# Altium PCB WPTChargerCoil.PcbDoc
Units mm, origin at the board's own origin, x right, y up, seen from the top; angles counter-clockwise.
Board outline 79.94 x 57.15 mm, 2 copper layers (Top Layer, Bottom Layer), stack 1.554 mm thick; 15 components, 4 nets, 22 pads, 0 vias.
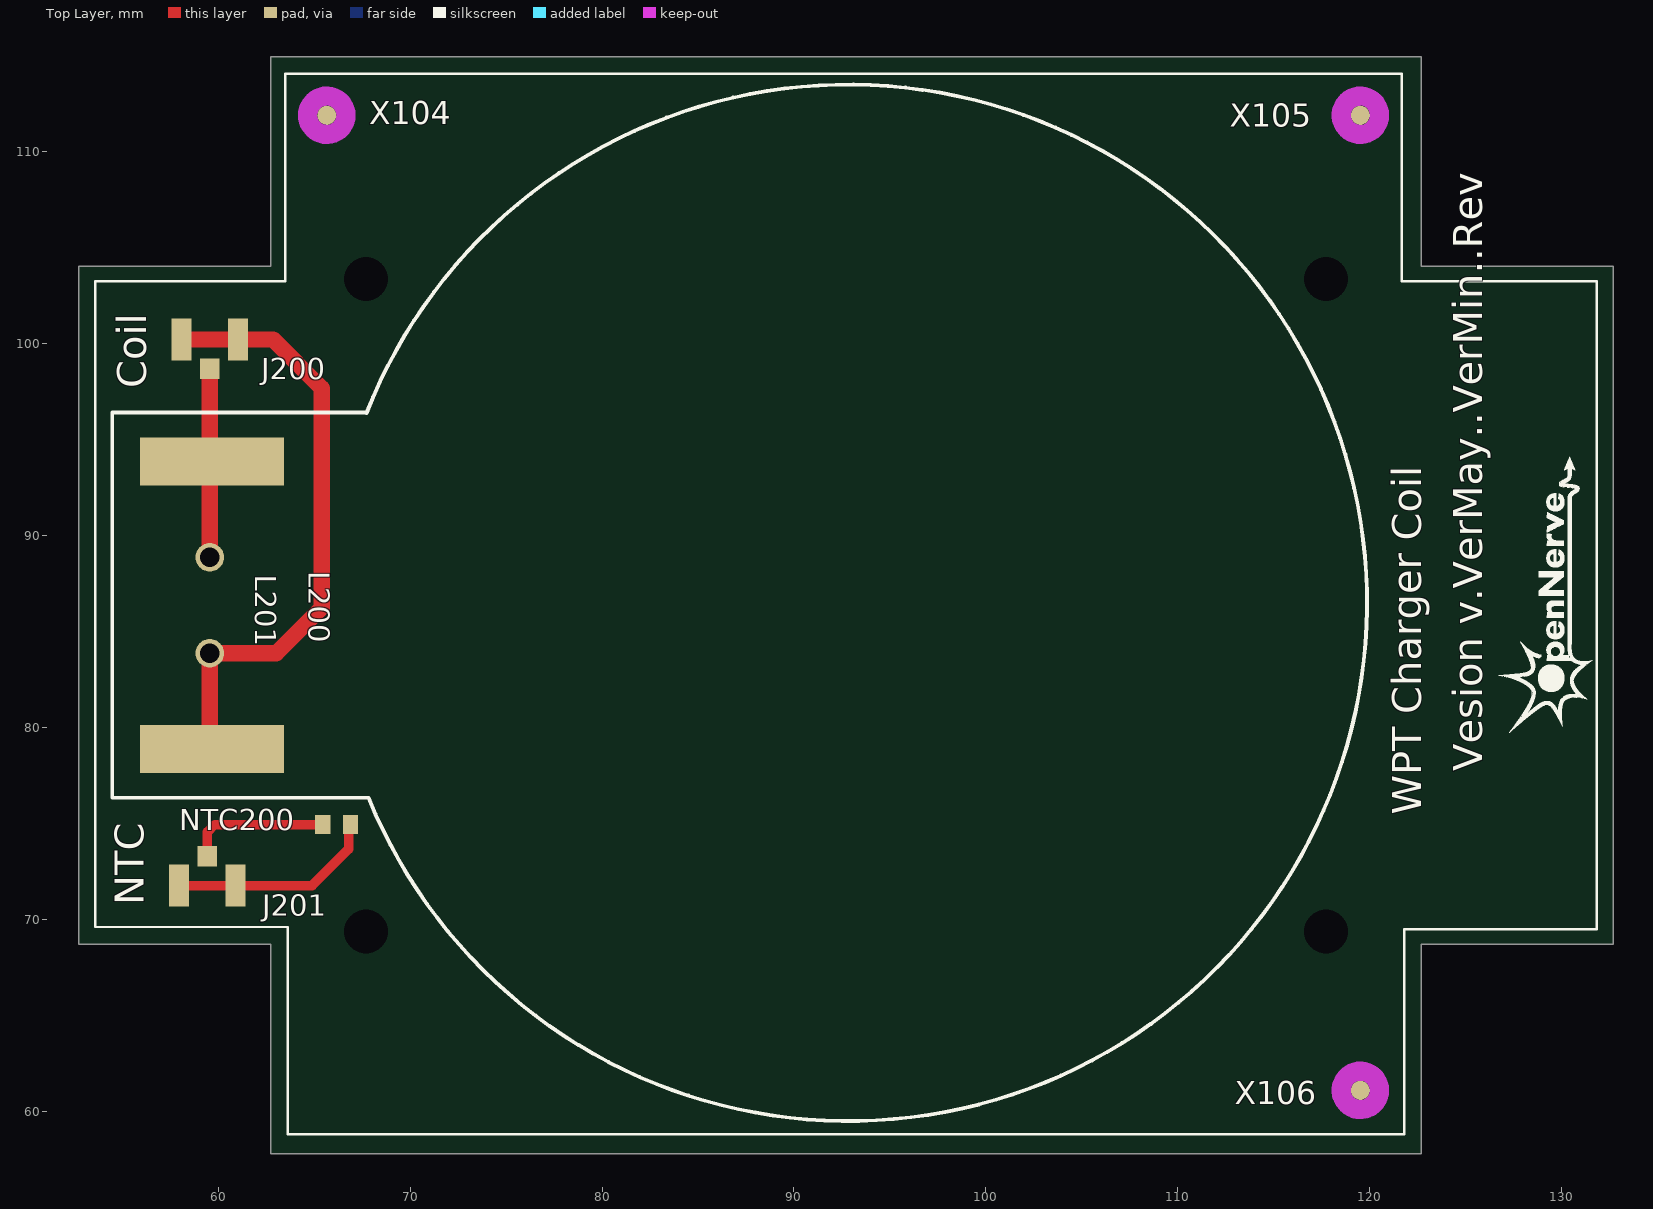
[diagram p0: Top Layer view]
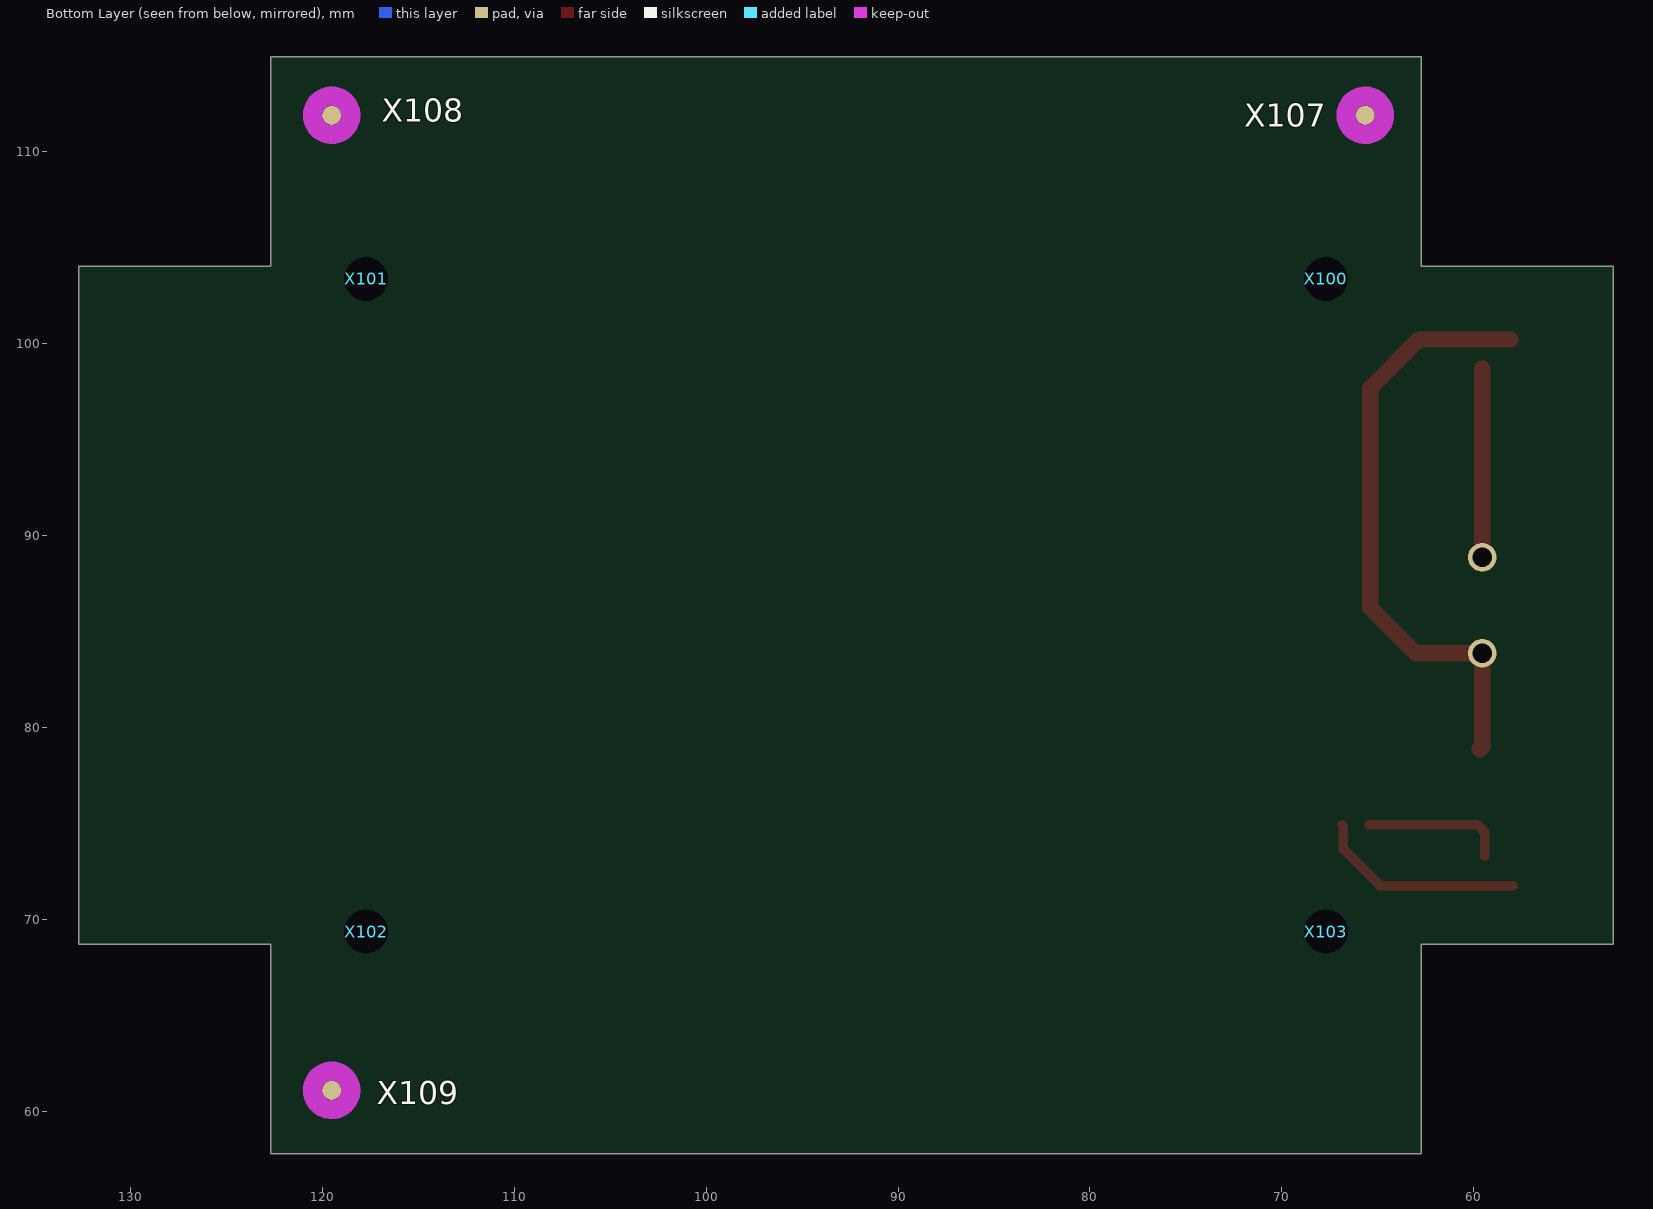
[diagram p1: Bottom Layer view, seen from below]
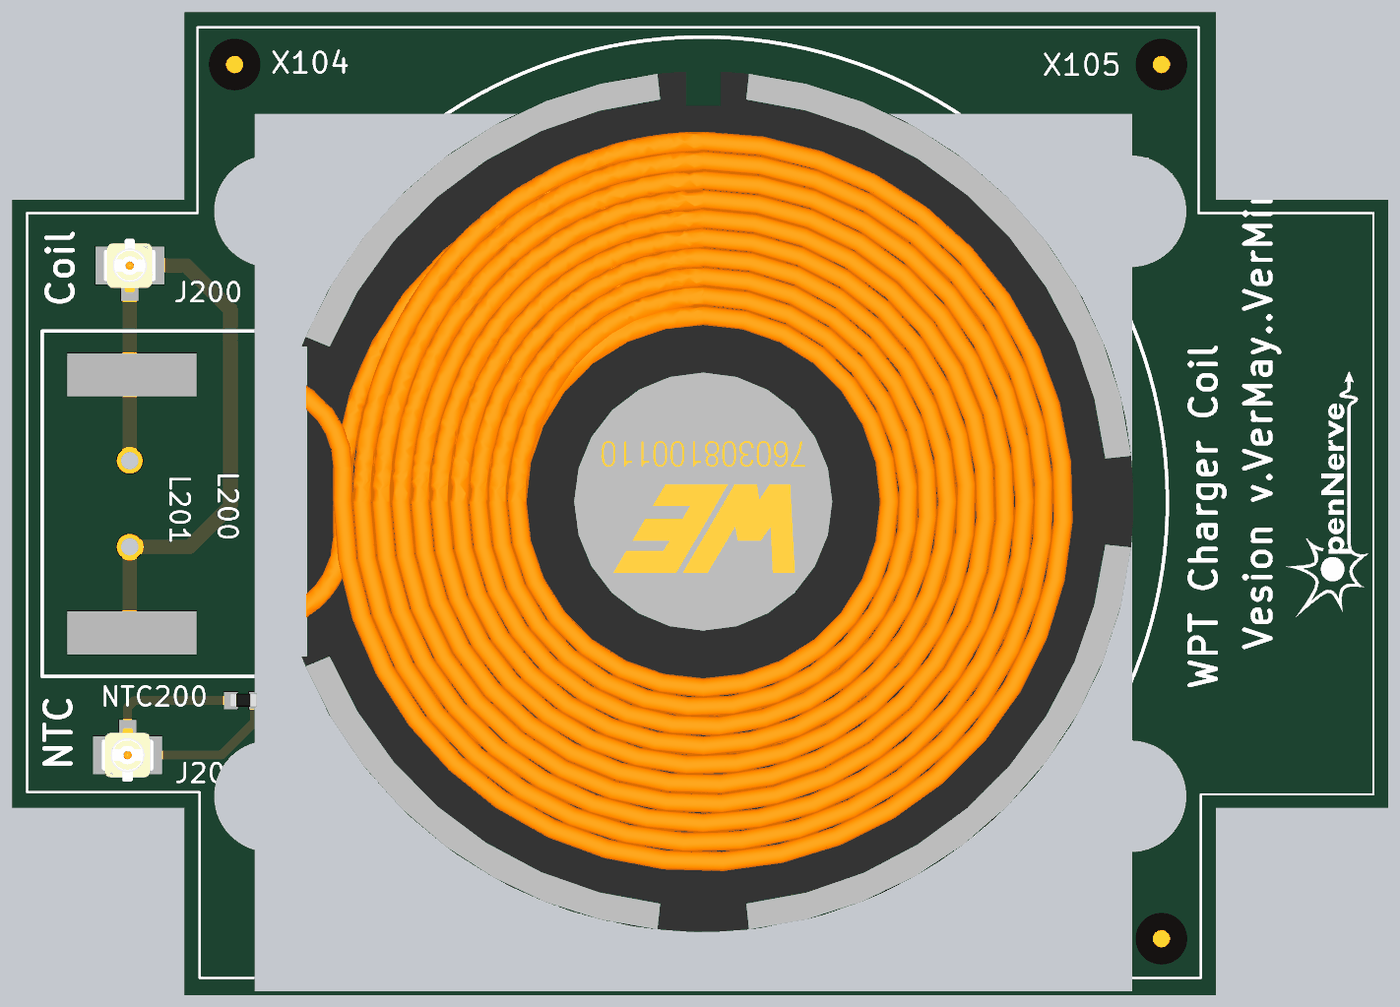
[diagram p2: 3D render of the assembled board from above, using the file's embedded part models]

## Layer stack, top to bottom
Top Solder: solder mask 0.0178, Solder Resist, Dk 3.5
Top Layer: signal copper 0.0356
Dielectric 1: dielectric 1.4834, FR-4, Dk 4.8
Bottom Layer: signal copper 0.0356
Bottom Solder: solder mask 0.0178, Solder Resist, Dk 3.5

## Board outline
52.738,68.707 52.738,104.013 62.738,104.013 62.738,114.935 122.682,114.935 122.682,104.013 132.682,104.013 132.682,68.707 122.682,68.707 122.682,57.789 62.738,57.789 62.738,68.707

## Design rules (kind name [scope] priority, off if disabled: settings)
BoardOutlineClearance [All] p1: gap=0.5 ignorepadtopadclearanceinfootprint=FALSE
Clearance [All] p1: gap=0.254 ignorepadtopadclearanceinfootprint=TRUE
ComponentClearance [All] p1: gap=0.127 collisioncheckmode=3 verticalgap=0.127 showdistances=TRUE
DiffPairsRouting [All] p1: maxlimit=0.254 minlimit=0.127 mostfreqgap=0.127 toplayer_minwidth=0.127 toplayer_maxwidth=25.4 toplayer_prefwidth=0.127 bottomlayer_minwidth=0.127 bottomlayer_maxwidth=25.4 bottomlayer_prefwidth=0.127 maxuncoupledlength=12.7
Height [All] p1: minheight=0 maxheight=1816.048 prefheight=12.7
HoleSize [All] p1: absolutevalues=TRUE maxlimit=6.3 minlimit=0.3 maxpercent=80.000 minpercent=20.000
HoleToHoleClearance [All] p1: gap=0.254 allowstackedmicrovias=FALSE
MinimumAnnularRing [All] p1: minimumring=0.152
MinimumSolderMaskSliver [All] p1: minsoldermaskwidth=0.152
PlaneClearance [All] p1: clearance=0.127
PlaneConnect PlaneConnectPowerPads [InPadClass('PowerPads')] p1: planeconnectstyle=Direct reliefexpansion=0.508 reliefentries=4 reliefconductorwidth=0.254 reliefairgap=0.254
PlaneConnect [All] p2: pad.planeconnectstyle=Relief pad.reliefexpansion=0.3 pad.reliefentries=4 pad.reliefconductorwidth=0.127 pad.reliefairgap=0.127 via.planeconnectstyle=Direct via.reliefexpansion=0.3 via.reliefentries=4 via.reliefconductorwidth=0.127 via.reliefairgap=0.127
PolygonConnect [All] p1: thpad.connectstyle=Relief thpad.reliefconductorwidth=0.127 thpad.reliefentries=4 thpad.polygonreliefangle="90 Angle" thpad.airgapwidth=0.127 smdpad.connectstyle=Relief smdpad.reliefconductorwidth=0.127 smdpad.reliefentries=4 smdpad.polygonreliefangle="90 Angle" smdpad.airgapwidth=0.127 via.connectstyle=Direct via.reliefconductorwidth=0.127 via.reliefentries=4 via.polygonreliefangle="90 Angle" via.airgapwidth=0.127
RoutingVias [All] p1: holewidth=0.3 width=0.6 viastyle="Through Hole" minholewidth=0.3 minwidth=0.6 maxholewidth=0.6 maxwidth=6.6
SilkToSilkClearance [All] p1: silktosilkclearance=0.127
SilkToSolderMaskClearance [IsPad] p1: minsilkscreentomaskgap=0.127 clearancetoexposedcopper=TRUE
SolderMaskExpansion [All] p1: expansion=0.051 istentingtop=FALSE
SupplyNets "Schematic Supply Nets" [InNet('GND')] p1: voltage=0.000
UnRoutedNet [All] p1: checkbadconnections=TRUE
Width Width_10mil [All] p1: maxlimit=25.4 minlimit=0.254 preferedwidth=0.254 minimp=50.000000 maximp=50.000000 favimp=50.000000
Width Width_6mil [All] p2: maxlimit=25.4 minlimit=0.152 preferedwidth=0.152 minimp=50.000000 maximp=50.000000 favimp=50.000000
Width Power_20mil [All] p3: maxlimit=25.4 minlimit=0.508 preferedwidth=0.508 minimp=50.000000 maximp=50.000000 favimp=50.000000
Width Power_12mil [All] p4: maxlimit=25.4 minlimit=0.305 preferedwidth=0.305 minimp=50.000000 maximp=50.000000 favimp=50.000000
Width Width_5mil [All] p5: maxlimit=25.4 minlimit=0.127 preferedwidth=0.127 minimp=50.000000 maximp=50.000000 favimp=50.000000
19 further rules are at their usual default settings.

## Classes and differential pairs
component class 02-TxCoil: J200 J201 L200 L201 NTC200
component class 01-Cover: X100 X101 X102 X103 X104 X105 X106 X107 X108 X109

## Components (designator, comment, footprint, x,y, rotation, side; value= is the part's Value field where it differs from the comment)
J200 "U.FL-R-SMT-1(10)" FP-U_FL-R-SMT-1_10-MFG 59.563,100.203 r0 top
J201 "U.FL-R-SMT-1(10)" FP-U_FL-R-SMT-1_10-MFG 59.436,71.755 r180 top
L200 "760308100110" "760308100110 SMD" 59.69,86.36 r0 top locked value=24uH
L201 "760308100110" Coil_pads-5mm-ThroughHole 59.563,86.36 r90 top value=24uH
NTC200 "NTCS0603E3502FLT" NTC0603 66.167,74.93 r180 top value=5k
X100 "HOLE_UNPLATED_2.3MM" HOLE_UNPLATED_2.3MM_COUNTERSINK 67.71,103.36 r90 bottom
X101 "HOLE_UNPLATED_2.3MM" HOLE_UNPLATED_2.3MM_COUNTERSINK 117.71,103.36 r90 bottom
X102 "HOLE_UNPLATED_2.3MM" HOLE_UNPLATED_2.3MM_COUNTERSINK 117.71,69.36 r90 bottom
X103 "HOLE_UNPLATED_2.3MM" HOLE_UNPLATED_2.3MM_COUNTERSINK 67.71,69.36 r90 bottom
X104 "FIDUCIAL" Fid_IPC-7351B 65.659,111.887 r90 top
X105 "FIDUCIAL" Fid_IPC-7351B 119.507,111.887 r90 top
X106 "FIDUCIAL" Fid_IPC-7351B 119.507,61.087 r90 top
X107 "FIDUCIAL" Fid_IPC-7351B 65.659,111.887 r90 bottom
X108 "FIDUCIAL" Fid_IPC-7351B 119.507,111.887 r90 bottom
X109 "FIDUCIAL" Fid_IPC-7351B 119.507,61.087 r90 bottom

## Footprints (in the part's own frame and the unit in brackets; to place one, negate y for a bottom-side part, rotate by r counter-clockwise, add the part's x,y. Pads: shape width x height; smd on the part's side, far side on the other; paste and mask are expansions set on the pad)
"760308100110 SMD" [mm]
  rect 7.5x2.5 smd: 1(0,-7.5) 2(0,7.5)
  silkscreen extent -5.21,-26.87 60.16,27.13, body extent 9.87,-24.86 58.18,25.11, height 4.26
Coil_pads-5mm-ThroughHole [mm]
  round 1.5 hole 1.02: 1(-2.5,0) 2(2.5,0)
Fid_IPC-7351B [mm]
  round 1 smd paste-5 mask+1: Fid(0,0)
  Top Layer keep-out circle w1: c0,0 r1
FP-U_FL-R-SMT-1_10-MFG [mm]
  rect 1x1.05 smd: 1(0,-1.525)
  rect 1.05x2.2 smd: 2(1.475,0) 3(-1.475,0)
  body extent -1.5,-1.55 1.5,1.55, height 1.45
HOLE_UNPLATED_2.3MM_COUNTERSINK [mm] "4.4mm diamater and 90 degrees angle countersink"
  round 0 hole 2.3 unplated paste-2539.97 mask+0.102: 1(0,0)
NTC0603 [mm] "Chip Resistor, 2-Leads, Body 1.50x0.80mm, IPC High Density"
  rect 0.8x1 smd: 1(-0.725,0) 2(0.725,0)
  body extent -0.8,-0.42 0.8,0.38, height 0.8

## Part data
J200 J201: "RF Connector, 1 Contact(s), Male, Board Mount, Surface Mount Terminal, Receptacle", Contact Resistance=20mR, Dielectric Withstanding Voltage (AC)=200V, Insulation Color=Beige, Insulation Resistance=500MR, Manufacturer=Hirose, Max Operating Temperature=90°C, Min Operating Temperature=-40°C, Operating Frequency-Max=6GHz, Supplier Part Number=H11891CT-ND, Body Depth=0.098inch, Body Diameter=0.079inch, Body/Shell Style=RECEPTACLE, Category="RF / Coaxial Connectors", Characteristic Impedance=50R, ComponentLink1Description=https://datasheet.ciiva.com:443/pdfs/VipMasterIC/IC/HIRO/HIROS10696/HIROS08829-1.pdf?src-supplier=IHS+Markit, ComponentLink1URL=https://datasheet.ciiva.com:443/pdfs/VipMasterIC/IC/HIRO/HIROS10696/HIROS08829-1.pdf?src-supplier=IHS+Markit, ComponentLink2Description=https://datasheet.ciiva.com/11762/0900766b8105243f-11762474.pdf?src-supplier=Rs, ComponentLink2URL=https://datasheet.ciiva.com/11762/0900766b8105243f-11762474.pdf?src-supplier=Rs, ComponentLink3Description=https://datasheet.ciiva.com/7651/91524-7651914.pdf?src-supplier=Element14, ComponentLink3URL=https://datasheet.ciiva.com/7651/91524-7651914.pdf?src-supplier=Element14, ComponentLink4Description=https://datasheet.ciiva.com/7651/91524-7651915.pdf?src-supplier=Element14, ComponentLink4URL=https://datasheet.ciiva.com/7651/91524-7651915.pdf?src-supplier=Element14, Connector Type="RF CONNECTOR", Contact Finish - Mating=GOLD, Contact Finish - Termination=GOLD, Contact Gender=Male, Contact Material=Bronze, Contact Style=Coax, Coupling Type=Snap, DIN Conformance=No, Durability=30Cycles, Filter Feature=No, IEC Conformance=No, Insertion Loss=0.05dB, Insulation Material=Polymer, JESD-609 Code=e4, Manufacturer Part Number=U.FL-R-SMT-1(10), Mating Information="MULTIPLE MATING PARTS AVAILABLE", MIL Conformance=No, Mounting Option 1=LOCKING, Mounting Style=STRAIGHT, Mounting Technology=Board, Number of Contacts=1, Number of Ports=1, Option="General Purpose", Panel Mount=No, Pricing="1=1,35, 10=1,138, 25=1,092, 50=1,0686, 100=1,0221, 250=0,9292, 500=0,83628, 1000=0,74336 (USD)", Reach SVHC Compliant=Yes, Reference Standard=UL, Reliability=COMMERCIAL, RoHS=Yes, RoHS Compliant=Yes, Shell Finish=Silver, Shell Material=CuSn, Stock=112692, Supplier=Digi-Key, Supplier 1=Digikey, Supplier Part Number 1=H11891CT-ND, System=Connector, Termination=SMD/SMT, VSWR=1.5
L200 L201: "1 Coil, 2 Layer 24µH Wireless Charging Coil Transmitter 70mOhm", Manufacturer=Wurth, Rating=6A, Supplier Part Number 1=732-5283-ND, Category=Coil, Diameter=50mm, Manufacturer Part Number=760308100110, Supplier 1=Digikey, Thickness=6mm
NTC200: "NTC SMD 0603, 5KOHM, 1%, B25/85", B Tolerance=1%, Manufacturer="Vishay Dale", Max Power=100mW, Operating Temperature="40°C ~ 125°C", Package=0603, Manufacturer Part Number=NTCS0603E3502FLT, Mounting Type="Surface Mount", Tolerance=1%
X100 X101 X102 X103: "Hole, Unplated, 2.3mm"
X104 X105 X106 X107 X108 X109: "FIDUCIAL_MARK", Manufacturer PN=FIDUCIAL

## Nets (pads, with @x,y where several pads share a name; then routed paths per layer and width w, separated by ;. In a path a pad name is that pad's centre, name@x,y a point inside that pad or via, vN(x,y) a via of type N, cw(c..) or ccw(c..) an arc to the next point about the centre after c; other vN are vias at no path point)
GND: J201.2 J201.3 NTC200.1 | length 10.9
  Top Layer w0.5: J201.2 J201.3 64.897,71.755 66.802,73.66 66.802,74.84 NTC200.1
NTC: J201.1 NTC200.2 | length 7.4
  Top Layer w0.5: J201.1 59.436,74.549 59.817,74.93 NTC200.2
Tx_COIL_1: J200.1 L200.2 L201.2 | length 9.9
  Top Layer w0.85: J200.1 59.563,93.86 59.563,89.163 59.69,89.036 L201.2@59.69,88.86
Tx_COIL_2: J200.2 J200.3 L200.1 L201.1 | length 31.7
  Top Layer w0.85: J200.3 J200.2 62.865,100.203 65.405,97.663 65.405,86.233 63.032,83.86 L201.1 59.563,78.987 L200.1
pads on no net: X100.1 X101.1 X102.1 X103.1 X104.Fid X105.Fid X106.Fid X107.Fid X108.Fid X109.Fid

## Silkscreen, mask and mechanical layers (free items; w line width, h text height)
Top Overlay:
  drawing of 21 lines, arcs and shapes, not listed
  text "Coil" at 56.261,97.663 h1.52 r90
  text "Vesion v.VerMay..VerMin..Rev" at 125.857,77.724 h1.52 r90
  text "WPT Charger Coil" at 122.682,75.438 h1.52 r90
  text "NTC" at 56.134,70.739 h1.52 r90
Board Shape:
  the board outline again, w0.127
Mechanical Inputs:
  circle w0.05: c117.71,69.36 r3.25
  circle w0.05: c117.71,103.36 r3.25
  circle w0.05: c67.71,103.36 r3.25
  circle w0.05: c67.71,69.36 r3.25
  lines w0.1: 66.802,58.039 117.802,58.039 117.802,109.039 66.802,109.039 66.802,58.039